# Altium PCB PCB1.pcbdoc
Units mil, origin at the board's own origin, x right, y up, seen from the top; angles counter-clockwise.
Board outline 1900 x 1955.55 mil, 2 copper layers (Top Layer, Bottom Layer); 17 components, 16 nets, 67 pads, 15 vias.
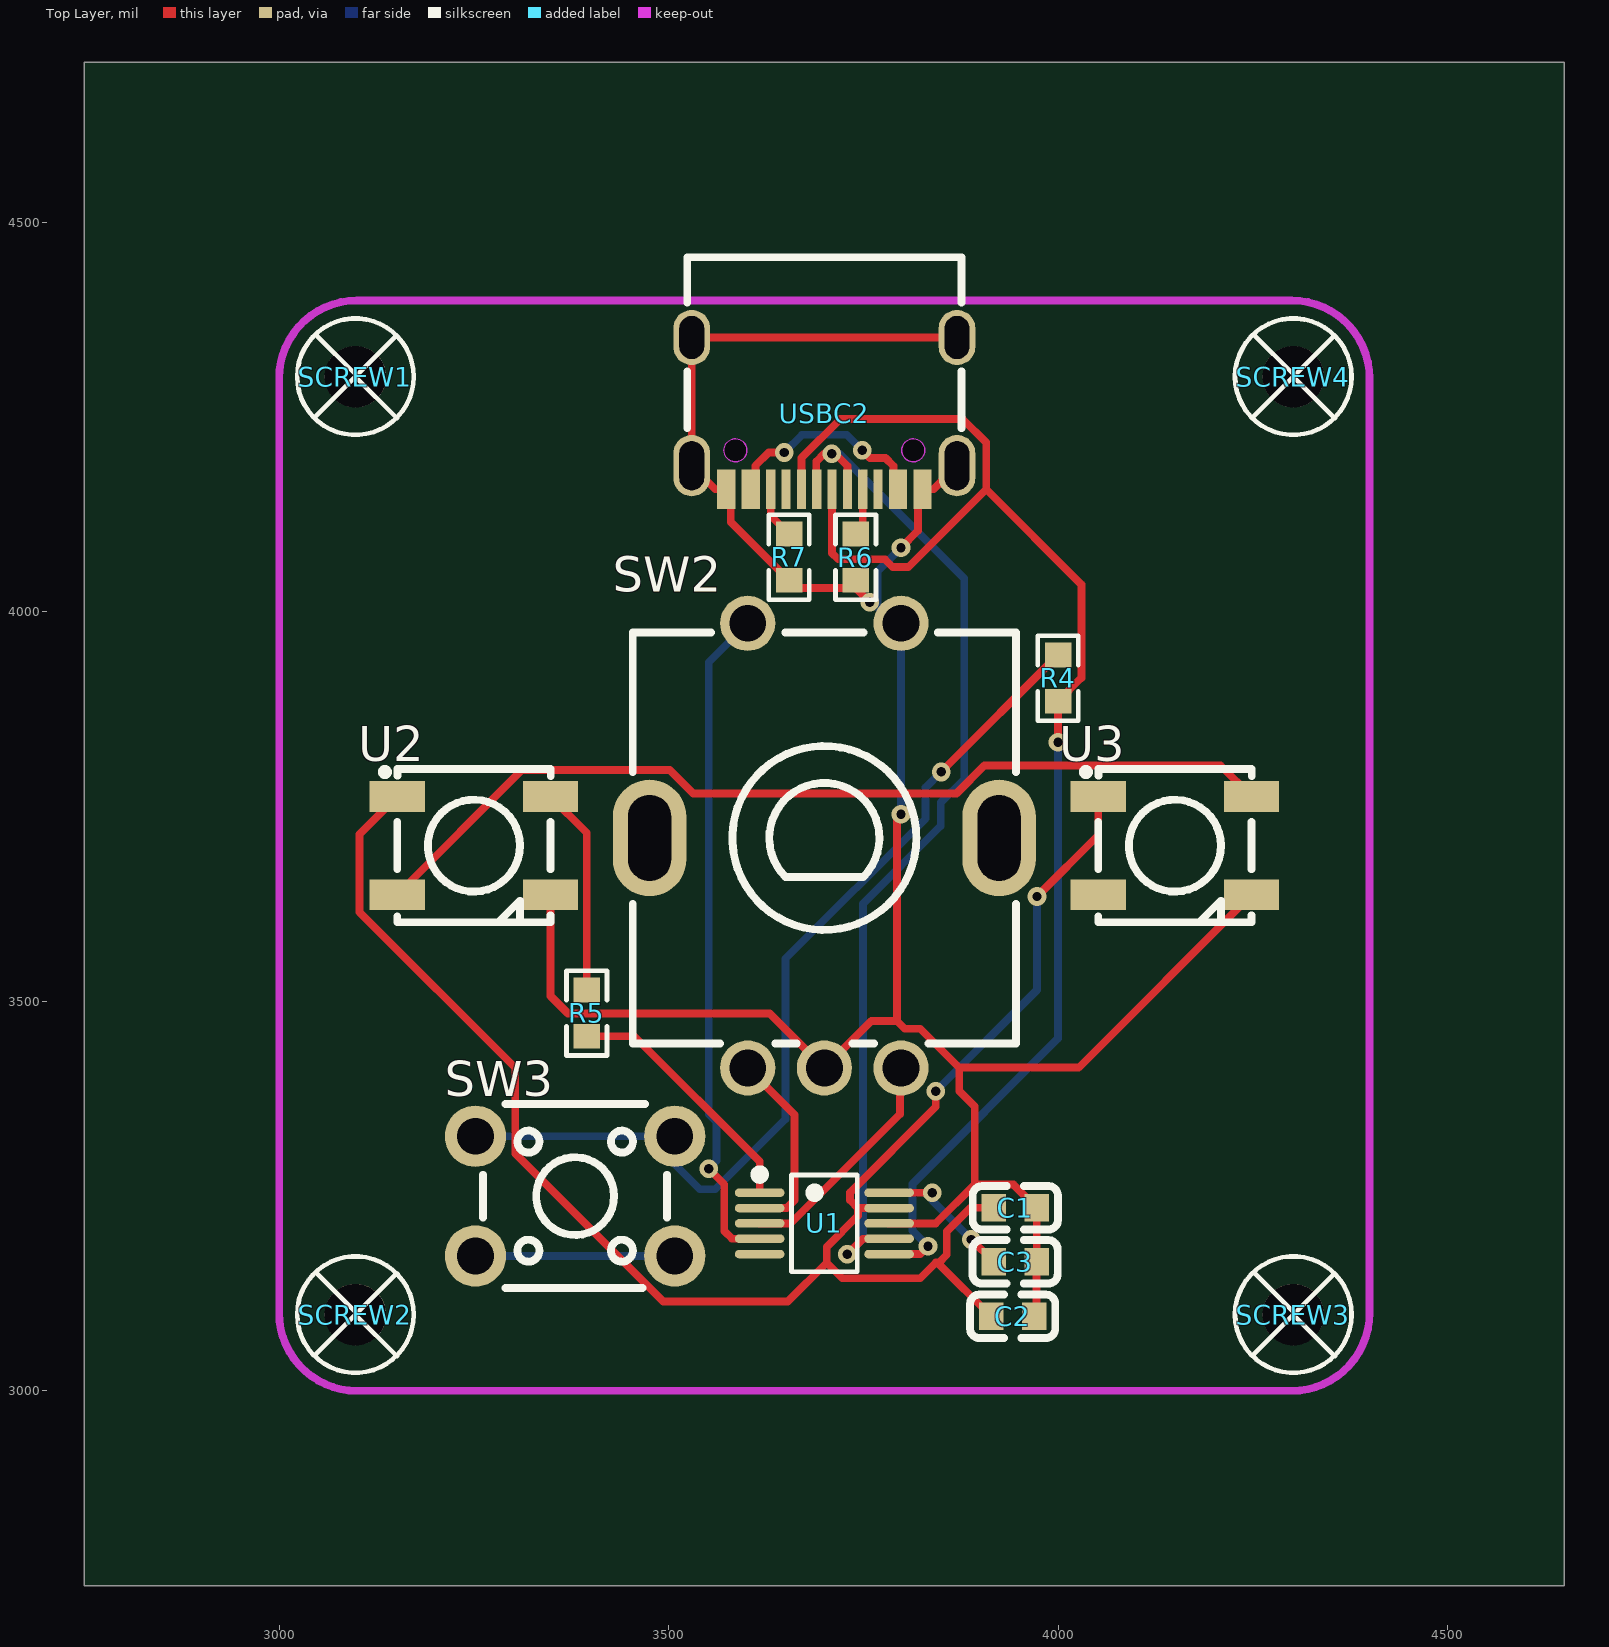
[diagram p0: Top Layer view]
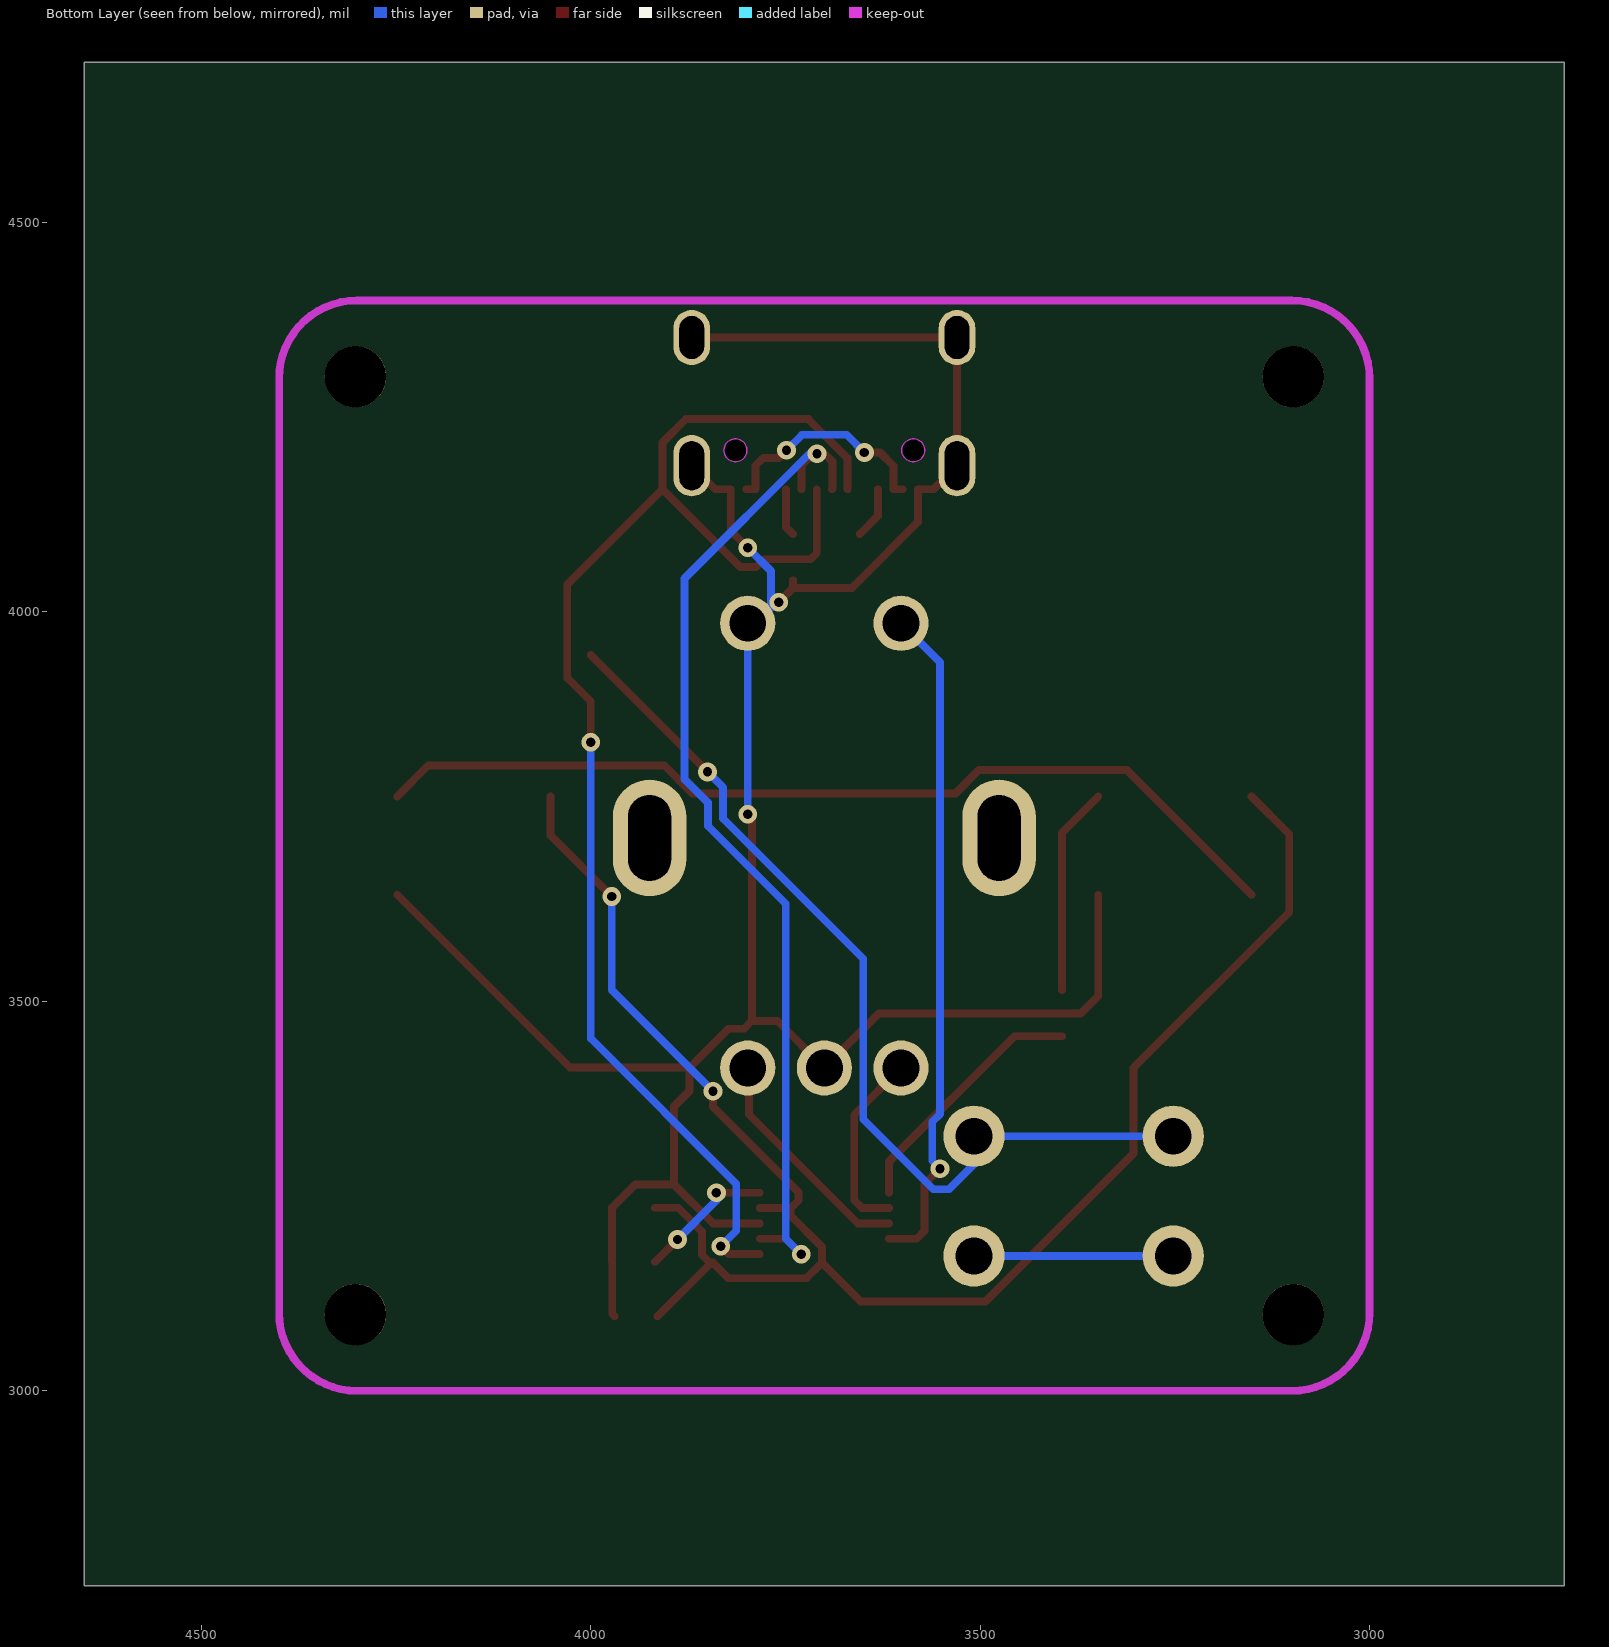
[diagram p1: Bottom Layer view, seen from below]

## Layer stack, top to bottom
Top Layer: signal copper (thickness not stored)
Dielectric: dielectric 12.6, FR-4, Dk 4.8
Bottom Layer: signal copper (thickness not stored)

## Board outline
4650,2750 2750,2750 2750,4705.55 4650,4705.55

## Design rules (kind name [scope] priority, off if disabled: settings)
BoardOutlineClearance copperThickness1oz [All] p0: genericclearance=10 ignorepadtopadclearanceinfootprint=FALSE except(0: Arc-SplitContinuation Track-SplitContinuation SMDPad-SplitContinuation THPad-SplitContinuation Via-SplitContinuation Fill-SplitContinuation Poly-SplitContinuation Region-SplitContinuation Text-SplitContinuation; 6: Track-CutoutEdge SMDPad-CutoutEdge THPad-CutoutEdge Via-CutoutEdge Region-CutoutEdge; 11.8: Track-OutlineEdge SMDPad-OutlineEdge THPad-OutlineEdge Via-OutlineEdge Fill-OutlineEdge Region-OutlineEdge Poly-OutlineEdge Text-OutlineEdge Fill-CutoutEdge)
BoardOutlineClearance copperThickness2oz [All] p0: genericclearance=10 ignorepadtopadclearanceinfootprint=FALSE except(0: Arc-SplitContinuation Track-SplitContinuation SMDPad-SplitContinuation THPad-SplitContinuation Via-SplitContinuation Fill-SplitContinuation Poly-SplitContinuation Region-SplitContinuation Text-SplitContinuation; 6: Track-CutoutEdge SMDPad-CutoutEdge THPad-CutoutEdge Via-CutoutEdge Region-CutoutEdge; 11.8: Track-OutlineEdge SMDPad-OutlineEdge THPad-OutlineEdge Via-OutlineEdge Fill-OutlineEdge Region-OutlineEdge Poly-OutlineEdge Text-OutlineEdge Fill-CutoutEdge)
Clearance copperThickness1oz [(InNet('GND') OR InNet('$1N1196') OR InNet('$1N1197') OR InNet('A') OR InNet('B') OR InNet('SW') OR InNet('DIN') OR InNet('+3V3') OR InNet('VCC') OR InNet('DN') OR InNet('DP') OR InNet('DOUT') OR InNet('+5V') OR InNet('$1N1822') OR InNet('$1N2076') OR InNet('$1N4524'))] p1: gap=7 ignorepadtopadclearanceinfootprint=FALSE except(4: Track-Track; 6: Track-SMDPad SMDPad-SMDPad Track-THPad SMDPad-THPad THPad-THPad Track-Via SMDPad-Via THPad-Via Via-Via SMDPad-Fill THPad-Fill Via-Fill Fill-Fill Track-Region SMDPad-Region THPad-Region Via-Region Region-Region Track-Poly SMDPad-Poly THPad-Poly Via-Poly Fill-Poly Region-Poly Poly-Poly Track-Text SMDPad-Text THPad-Text Via-Text Fill-Text Region-Text Poly-Text Text-Text; 6.9: Track-Hole SMDPad-Hole THPad-Hole Via-Hole Fill-Hole Region-Hole Poly-Hole Text-Hole Sheet-Hole; 11.8: Track-Fill Fill-Region Track-Sheet SMDPad-Sheet THPad-Sheet Via-Sheet Fill-Sheet Region-Sheet Poly-Sheet Text-Sheet)
Clearance copperThickness2oz [All] p1: gap=7 ignorepadtopadclearanceinfootprint=FALSE except(6: Track-SMDPad SMDPad-SMDPad Track-THPad SMDPad-THPad THPad-THPad Track-Via SMDPad-Via THPad-Via Via-Via SMDPad-Fill THPad-Fill Via-Fill Fill-Fill Track-Region SMDPad-Region THPad-Region Via-Region Region-Region Track-Poly SMDPad-Poly THPad-Poly Via-Poly Fill-Poly Region-Poly Poly-Poly Track-Text SMDPad-Text THPad-Text Via-Text Fill-Text Region-Text Poly-Text Text-Text; 6.9: Track-Hole SMDPad-Hole THPad-Hole Via-Hole Fill-Hole Region-Hole Poly-Hole Text-Hole Sheet-Hole; 8: Track-Track; 11.8: Track-Fill Fill-Region Track-Sheet SMDPad-Sheet THPad-Sheet Via-Sheet Fill-Sheet Region-Sheet Poly-Sheet Text-Sheet)
DiffPairsRouting differentialPair [All] p1: maxuncoupledlength=10 minlimit=6 maxlimit=6 mostfreqgap=6 toplayer_minwidth=5 toplayer_prefwidth=10 toplayer_maxwidth=100 bottomlayer_minwidth=5 bottomlayer_prefwidth=10 bottomlayer_maxwidth=100
PasteMaskExpansion pasteMaskExpansion [All] p1: expansion=0
PlaneConnect innerPlane [All] p1: planeconnectstyle=Relief reliefexpansion=20 reliefentries=4 reliefconductorwidth=10 reliefairgap=10
PolygonConnect copperRegion [All] p1: connectstyle=Relief reliefentries=4 reliefconductorwidth=10 polygonreliefangle="90 Angle" airgapwidth=10
RoutingVias viaSize [All] p1: viastyle="Through Hole" holewidth=12.0078 minholewidth=11.811 maxholewidth=248.0314 width=24.0158 minwidth=19.685 maxwidth=393.7008
SolderMaskExpansion solderMaskExpansion [All] p1: useseparateexpansions=TRUE expansion=2 expansionbottom=2
Width copperThickness1oz [All] p1: maxlimit=100 minlimit=5 preferedwidth=10
Width copperThickness2oz [All] p1: maxlimit=100 minlimit=8 preferedwidth=10

## Components (designator, comment, footprint, x,y, rotation, side; value= is the part's Value field where it differs from the comment)
C1 "" C0603 3945.12,3235 r180 top
C2 "" C0603 3941.77,3095.71 r180 top
C3 "" C0603 3944.83,3165.71 r180 top
R4 "" R0603 4000,3915 r90 top
R5 "" R0603 3395,3485 r270 top
R6 "" R0603 3740.34,4070.34 r270 top
R7 "" R0603 3654.66,4070.34 r90 top
SCREW1 "" Screw-Hole-M2 3097.92,4302.08 r0 top
SCREW2 "" Screw-Hole-M2 3097.92,3097.92 r0 top
SCREW3 "" Screw-Hole-M2 4302.08,3097.92 r0 top
SCREW4 "" Screw-Hole-M2 4302.08,4302.08 r0 top
SW2 "" SW-TH_PEC11R-4XXXF-SXXXX 3700,3700 r0 top
SW3 "" KEY-TH_4P-L6.0-W6.0-P3.90-LS6.5 3380,3250 r0 top
U1 "" MSOP-10_L3.0-W3.0-P0.50-LS5.0-BL 3700,3215 r270 top
U2 "" LED-SMD_4P-L5.0-W5.0-TL-1 3250,3700 r0 top
U3 "" LED-SMD_4P-L5.0-W5.0-TL-1 4150,3700 r0 top
USBC2 "" USB-C_SMD-TYPE-C-31-M-12 3700,4255 r180 top

## Footprints (in the part's own frame and the unit in brackets; to place one, negate y for a bottom-side part, rotate by r counter-clockwise, add the part's x,y. Pads: shape width x height; smd on the part's side, far side on the other; paste and mask are expansions set on the pad)
C0603 [mm]
  rect 0.8x0.9 smd: 1(-0.7,0) 2(0.7,0)
  silkscreen extent -1.39,-0.71 1.39,0.71
KEY-TH_4P-L6.0-W6.0-P3.90-LS6.5 [mm]
  round 2 hole 1.2: 1(-3.25,1.95) 2(3.25,1.95) 3(-3.25,-1.95) 4(3.25,-1.95)
  silkscreen extent -3,-3 3,3
LED-SMD_4P-L5.0-W5.0-TL-1 [mm]
  rect 1.8x1 smd: 1(-2.5,1.6) 2(-2.5,-1.6) 3(2.5,-1.6) 4(2.5,1.6)
  silkscreen extent -3,-2.5 2.51,2.5
MSOP-10_L3.0-W3.0-P0.50-LS5.0-BL [mm]
  oval 0.28x1.62 smd: 1(-1,-2.11) 2(-0.5,-2.11) 3(0,-2.11) 4(0.5,-2.11) 5(1,-2.11) 6(1,2.11) 7(0.5,2.11) 8(0,2.11) 9(-0.5,2.11) 10(-1,2.11)
  silkscreen extent -1.74,-2.26 1.58,1.07
R0603 [mil]
  rect 31.75x34.02 smd: 1(-29.66,0) 2(29.66,0)
  silkscreen extent -55,-26 55,26
Screw-Hole-M2 [mm]
  round 2 hole 2: 1(0,0)
  silkscreen extent -1.9,-1.9 1.9,1.9
SW-TH_PEC11R-4XXXF-SXXXX [mm]
  round 1.8 hole 1.2: 1(-2.5,7.25) 2(2.5,7.25) A(-2.5,-7.25) B(2.5,-7.25) C(0,-7.25)
  oval 2.4x3.8 hole 1.4 slot 2.8 at 90 deg: MT1(-5.7,0.25) MT2(5.7,0.25)
  silkscreen extent -6.25,-6.45 6.25,6.95
USB-C_SMD-TYPE-C-31-M-12 [mm]
  oval 1.2x2 hole 0.8 slot 1.6 at 90 deg: 0(-4.325,1.706) 1(4.325,1.706)
  oval 1.2x1.8 hole 0.8 slot 1.4 at 90 deg: 2(4.325,-2.474) 3(-4.325,-2.474)
  rect 0.3x1.3 smd: A1(-3.35,2.474) A4(-2.55,2.474) A5(-1.25,2.474) A6(-0.25,2.474) A7(0.25,2.474) A8(1.25,2.474) A9(2.55,2.474) A12(3.35,2.474) B1(3.05,2.474) B4(2.25,2.474) B5(1.75,2.474) B6(0.75,2.474) B7(-0.75,2.474) B8(-1.75,2.474) B9(-2.25,2.474) B12(-3.05,2.474)
  Board Outline Layer circle w0.005: c-2.9,1.206 r0.375
  Board Outline Layer circle w0.005: c2.9,1.206 r0.375
  Board Outline Layer region: -3.275,1.206 -3.238,1.368 -3.134,1.499 -2.983,1.571 -2.816,1.571 -2.666,1.499 -2.562,1.368 -2.525,1.206 -2.525,1.206 -2.562,1.043 -2.666,0.912 -2.816,0.84 -2.983,0.84 -3.134,0.912 -3.238,1.043 -3.275,1.206
  Board Outline Layer region: 2.525,1.206 2.562,1.368 2.666,1.499 2.816,1.571 2.983,1.571 3.134,1.499 3.238,1.368 3.275,1.206 3.275,1.206 3.238,1.043 3.134,0.912 2.983,0.84 2.816,0.84 2.666,0.912 2.562,1.043 2.525,1.206
  Multi-Layer board cut-out: -3.275,1.206 -3.238,1.368 -3.134,1.499 -2.983,1.571 -2.816,1.571 -2.666,1.499 -2.562,1.368 -2.525,1.206 -2.525,1.206 -2.562,1.043 -2.666,0.912 -2.816,0.84 -2.983,0.84 -3.134,0.912 -3.238,1.043 -3.275,1.206
  Multi-Layer board cut-out: 2.525,1.206 2.562,1.368 2.666,1.499 2.816,1.571 2.983,1.571 3.134,1.499 3.238,1.368 3.275,1.206 3.275,1.206 3.238,1.043 3.134,0.912 2.983,0.84 2.816,0.84 2.666,0.912 2.562,1.043 2.525,1.206
  silkscreen extent -4.47,-5.09 4.47,0.49

## Via types
v1: diameter 24.02, hole 12.01, Top Layer to Bottom Layer, 15 vias

## Nets (pads, with @x,y where several pads share a name; then routed paths per layer and width w, separated by ;. In a path a pad name is that pad's centre, name@x,y a point inside that pad or via, vN(x,y) a via of type N, cw(c..) or ccw(c..) an arc to the next point about the centre after c; other vN are vias at no path point)
$1N1196: R6.1 USBC2.A5 | length 61.3
  Top Layer w10: R6.1 3749.21,4108.87 USBC2.A5
$1N1197: R7.2 USBC2.B5 | length 67.4
  Top Layer w10: USBC2.B5 3631.1,4123.56 R7.2
$1N1822: R4.2 SW3.1 SW3.2 | length 1225.2
  Top Layer w10: v1(3850,3794.66) R4.2
  Bottom Layer w10: SW3.1 SW3.2 3507.95,3290.87 3540,3258.82 3560,3258.82 3650,3348.82 3650,3554.66 3830,3734.66 3830,3774.66 v1(3850,3794.66)
$1N2076: R5.1 U2.4 | length 267.6
  Top Layer w10: U2.4 3395,3716.41 R5.1
$1N4524: SW3.3 SW3.4 | length 255.9
  Bottom Layer w10: SW3.3 SW3.4
+3V3: C3.2 U1.10 | length 176.8
  Top Layer w10: U1.10 v1(3838.61,3254.37) ; v1(3888.61,3194.37) C3.2
  Bottom Layer w10: v1(3838.61,3254.37) 3838.61,3244.37 v1(3888.61,3194.37)
+5V: USBC2.A4 USBC2.A9 USBC2.B4 USBC2.B9 | length 293.9
  Top Layer w10: USBC2.A9 USBC2.B4 3611.42,4187.59 3628.58,4204.75 v1(3648.58,4204.75) ; v1(3748.58,4207.59) 3758.58,4197.59 3778.58,4197.59 3788.58,4187.59 USBC2.B9 USBC2.A4
  Bottom Layer w10: v1(3648.58,4204.75) 3671.42,4227.59 3728.58,4227.59 v1(3748.58,4207.59)
A: SW2.A U1.2 | length 243.5
  Top Layer w10: SW2.A 3661.58,3354.57 3661.58,3244.68 3651.58,3234.68 U1.2
B: SW2.B U1.3 | length 298.2
  Top Layer w10: U1.3 3656.93,3215 3796.93,3355 3796.93,3413.07 SW2.B
DIN: R5.2 U1.1 | length 328.6
  Top Layer w10: R5.2 3455.96,3455.34 3616.93,3294.37 U1.1
DN: U1.7 USBC2.A7 USBC2.B7 | length 1344.2
  Top Layer w10: USBC2.A7 3689.53,4158.22 3689.53,4193.03 3699.53,4203.03 3714.1,4203.03 3729.53,4187.59 USBC2.B7 ; v1(3729.53,3175.31) 3749.53,3195.31 U1.7
  Bottom Layer w10: v1(3709.53,4203.03) 3719.53,4203.03 3879.53,4043.03 3879.53,3785.31 3849.53,3755.31 3849.53,3725.31 3749.53,3625.31 3749.53,3195.31 v1(3729.53,3175.31)
DOUT: U2.2 U3.4 | length 1207
  Top Layer w10: U2.2 3311.57,3797.01 3501.57,3797.01 3531.57,3767.01 3869.61,3767.01 3905.59,3802.99 4208.43,3802.99 U3.4
DP: R4.1 U1.6 USBC2.A6 USBC2.B6 | length 1874.1
  Top Layer w10: USBC2.B6 3670.47,4197.59 3720.47,4247.59 3877.75,4247.59 3907.75,4217.59 3907.75,4157.59 ; USBC2.A6 3709.84,4075.5 3717.75,4067.59 3777.75,4067.59 3787.75,4057.59 3807.75,4057.59 3907.75,4157.59 ; U1.6 3823.07,3175.63 v1(3833.07,3185.63) ; v1(4000,3832.56) R4.1 4030,3915.34 4030,4035.34 3907.75,4157.59
  Bottom Layer w10: v1(3833.07,3185.63) 3813.07,3205.63 3813.07,3265.63 4000,3452.56 v1(4000,3832.56)
GND: C1.1 C2.1 C3.1 R6.2 R7.1 SW2.2 SW2.C U1.8 U2.3 U3.3 USBC2.0 USBC2.1 USBC2.2 USBC2.3 USBC2.A1 USBC2.A12 USBC2.B1 USBC2.B12 | length 3370.2
  Top Layer w10: U2.3 3348.43,3507.01 3370.86,3484.57 3630,3484.57 SW2.C 3760.43,3475 3793.07,3475 ; R6.2 R6.2@3740.34,4030.68 ; v1(3758.43,4012.59) R6.2@3740.34,4030.68 ; U1.8 3843.07,3215 3893.07,3265 ; v1(3798.43,3740.36) 3793.07,3735 3793.07,3475 ; v1(3798.43,4082.59) 3820.08,4104.24 USBC2.B12 USBC2.A1 3840.03,4157.59 USBC2.0 ; USBC2.3 USBC2.2 USBC2.1 3559.97,4157.59 USBC2.A12 USBC2.B1 3579.92,4115.42 R7.1 3664.66,4030.68 R6.2@3740.34,4030.68 ; C2.1 3972.39,3098.77 C3.1 3972.68,3166 C1.1 3942.68,3265 3893.07,3265 ; U3.3 4026.41,3415 3873.07,3415 ; 3793.07,3475 3803.07,3465 3823.07,3465 3873.07,3415 ; 3873.07,3415 3873.07,3385 3893.07,3365 3893.07,3265
  Bottom Layer w10: v1(3758.43,4012.59) v1@3768.43,4012.59 ; v1(3798.43,3740.36) SW2.2 3788.43,3985.43 3768.43,4005.43 v1@3768.43,4012.59 ; v1(3798.43,4082.59) 3768.43,4052.59 v1@3768.43,4012.59
SW: SW2.1 U1.4 | length 866.9
  Top Layer w10: v1(3551.58,3285.31) 3571.58,3265.31 3571.58,3205.31 3581.58,3195.31 U1.4
  Bottom Layer w10: v1(3551.58,3285.31) 3561.58,3295.31 3561.58,3345.31 3551.58,3355.31 3551.58,3935.43 SW2.1
VCC: C1.2 C2.2 U1.9 U2.1 U3.1 | length 2226.1
  Top Layer w10: U2.1 3103.07,3714.49 3103.07,3614.68 3303.07,3414.68 3303.07,3304.68 3493.07,3114.68 3653.07,3114.68 3703.07,3164.68 ; U1.9 3743.07,3234.68 ; v1(3843.07,3384.68) 3843.07,3364.68 3733.07,3254.68 3733.07,3244.68 3743.07,3234.68 ; C2.2 3847.24,3162.68 3847.24,3164.68 ; C1.2 3887.56,3235 3857.24,3204.68 3857.24,3174.68 3847.24,3164.68 ; v1(3973.07,3634.68) 4051.57,3713.18 U3.1 ; 3703.07,3164.68 3703.07,3184.68 3743.07,3224.68 3743.07,3234.68 ; 3703.07,3164.68 3723.07,3144.68 3823.07,3144.68 3843.07,3164.68 3847.24,3164.68
  Bottom Layer w10: v1(3843.07,3384.68) 3973.07,3514.68 v1(3973.07,3634.68)
pads on no net: SCREW1.1 SCREW2.1 SCREW3.1 SCREW4.1 SW2.MT1 SW2.MT2 U1.5 U3.2 USBC2.A8 USBC2.B8

## Keep-outs
Board Outline Layer:
  lines w10: 3000,3100 ccw(c3100,3100) 3100,3000 4300,3000 ccw(c4300,3100) 4400,3100 4400,4300 ccw(c4300,4300) 4300,4400 3100,4400 ccw(c3100,4300) 3000,4300 3000,3100